# Altium PCB PCB.PcbDoc
Units mm, origin at the board's own origin, x right, y up, seen from the top; angles counter-clockwise.
Board outline 109.9 x 81.78 mm, 2 copper layers (Top Layer, Bottom Layer), stack 0.98 mm thick; 48 components, 25 nets, 128 pads, 18 vias.
Unrouted connection lines stored in the file: 4.
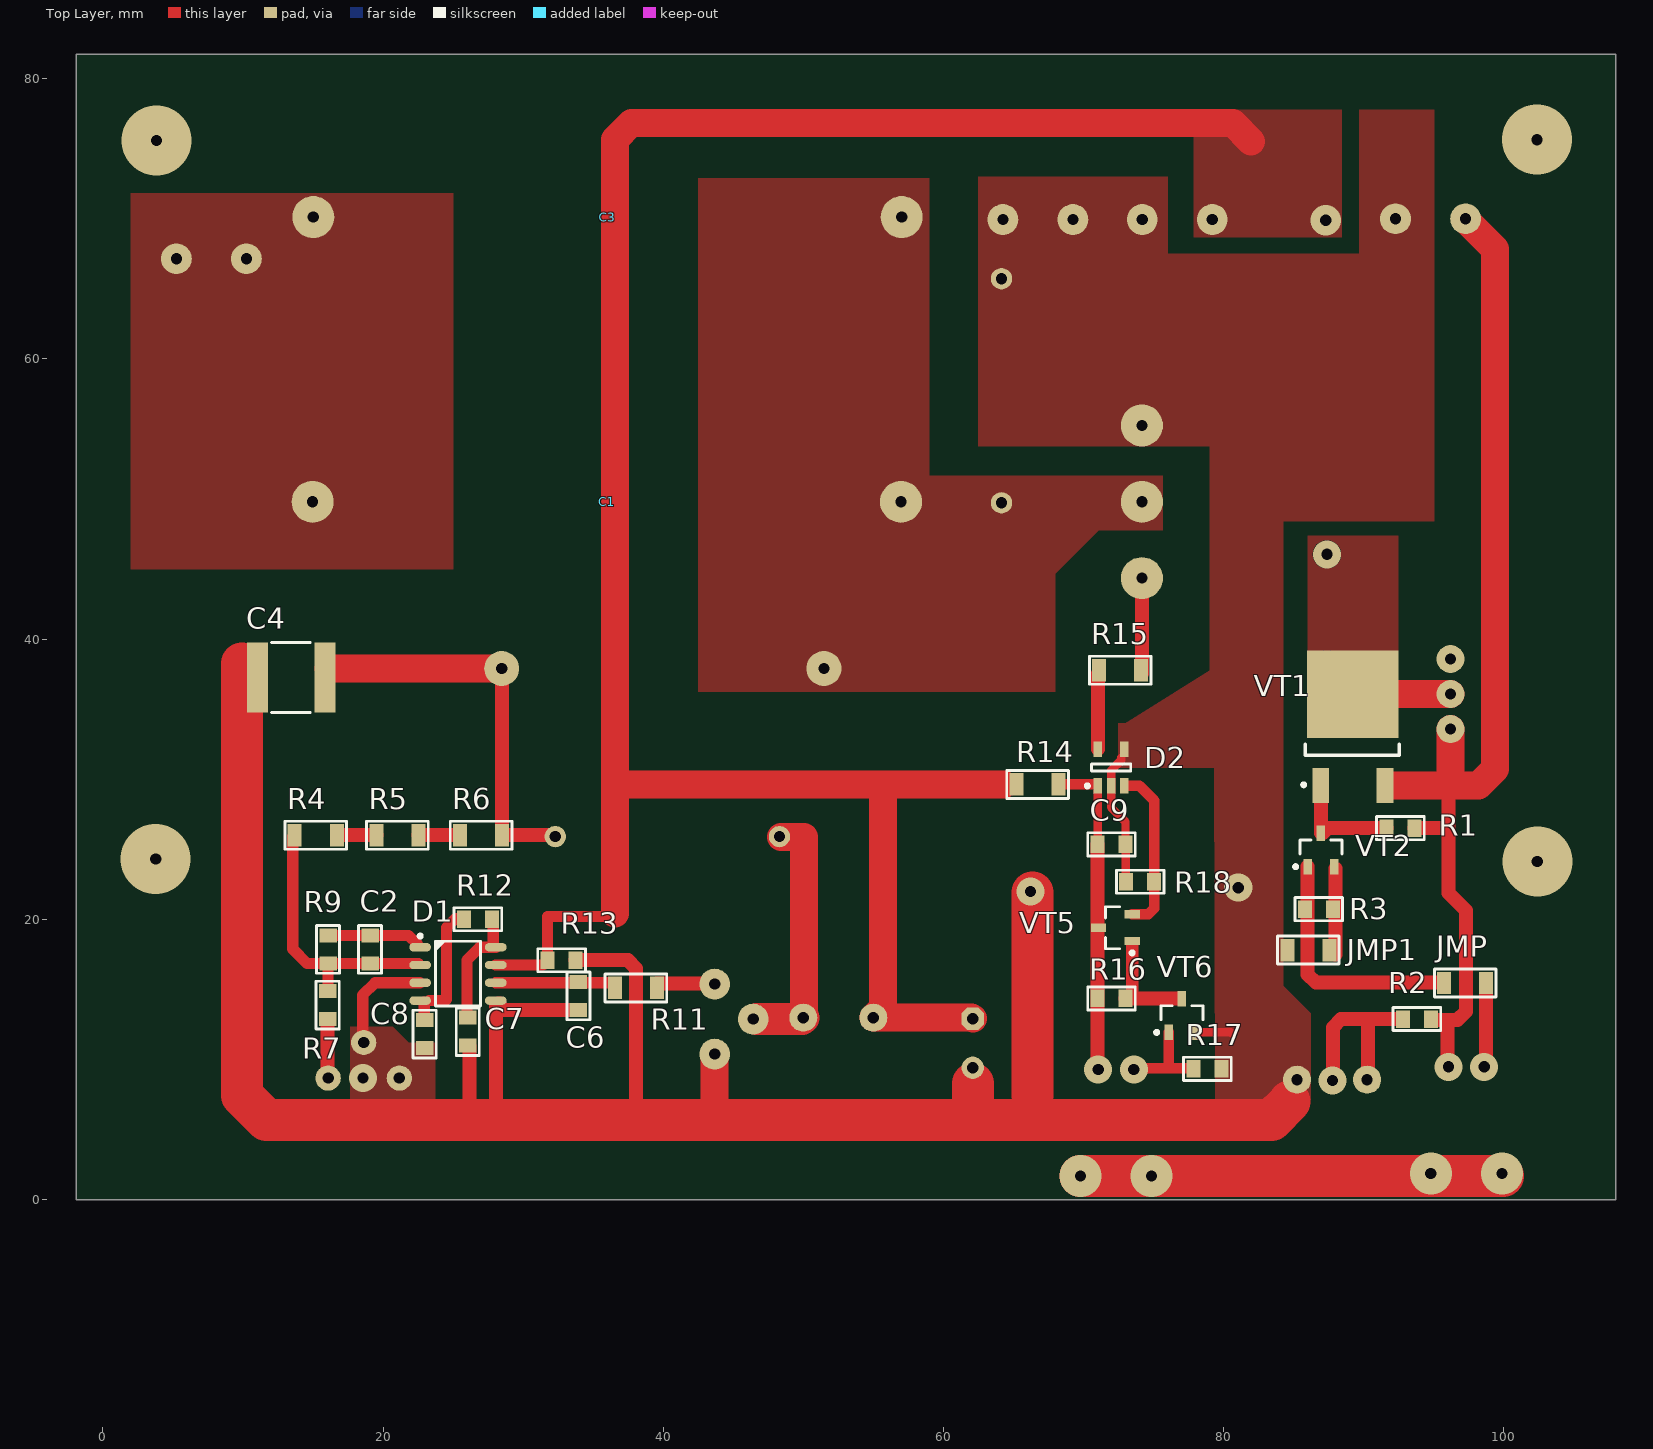
[diagram p0: Top Layer view]
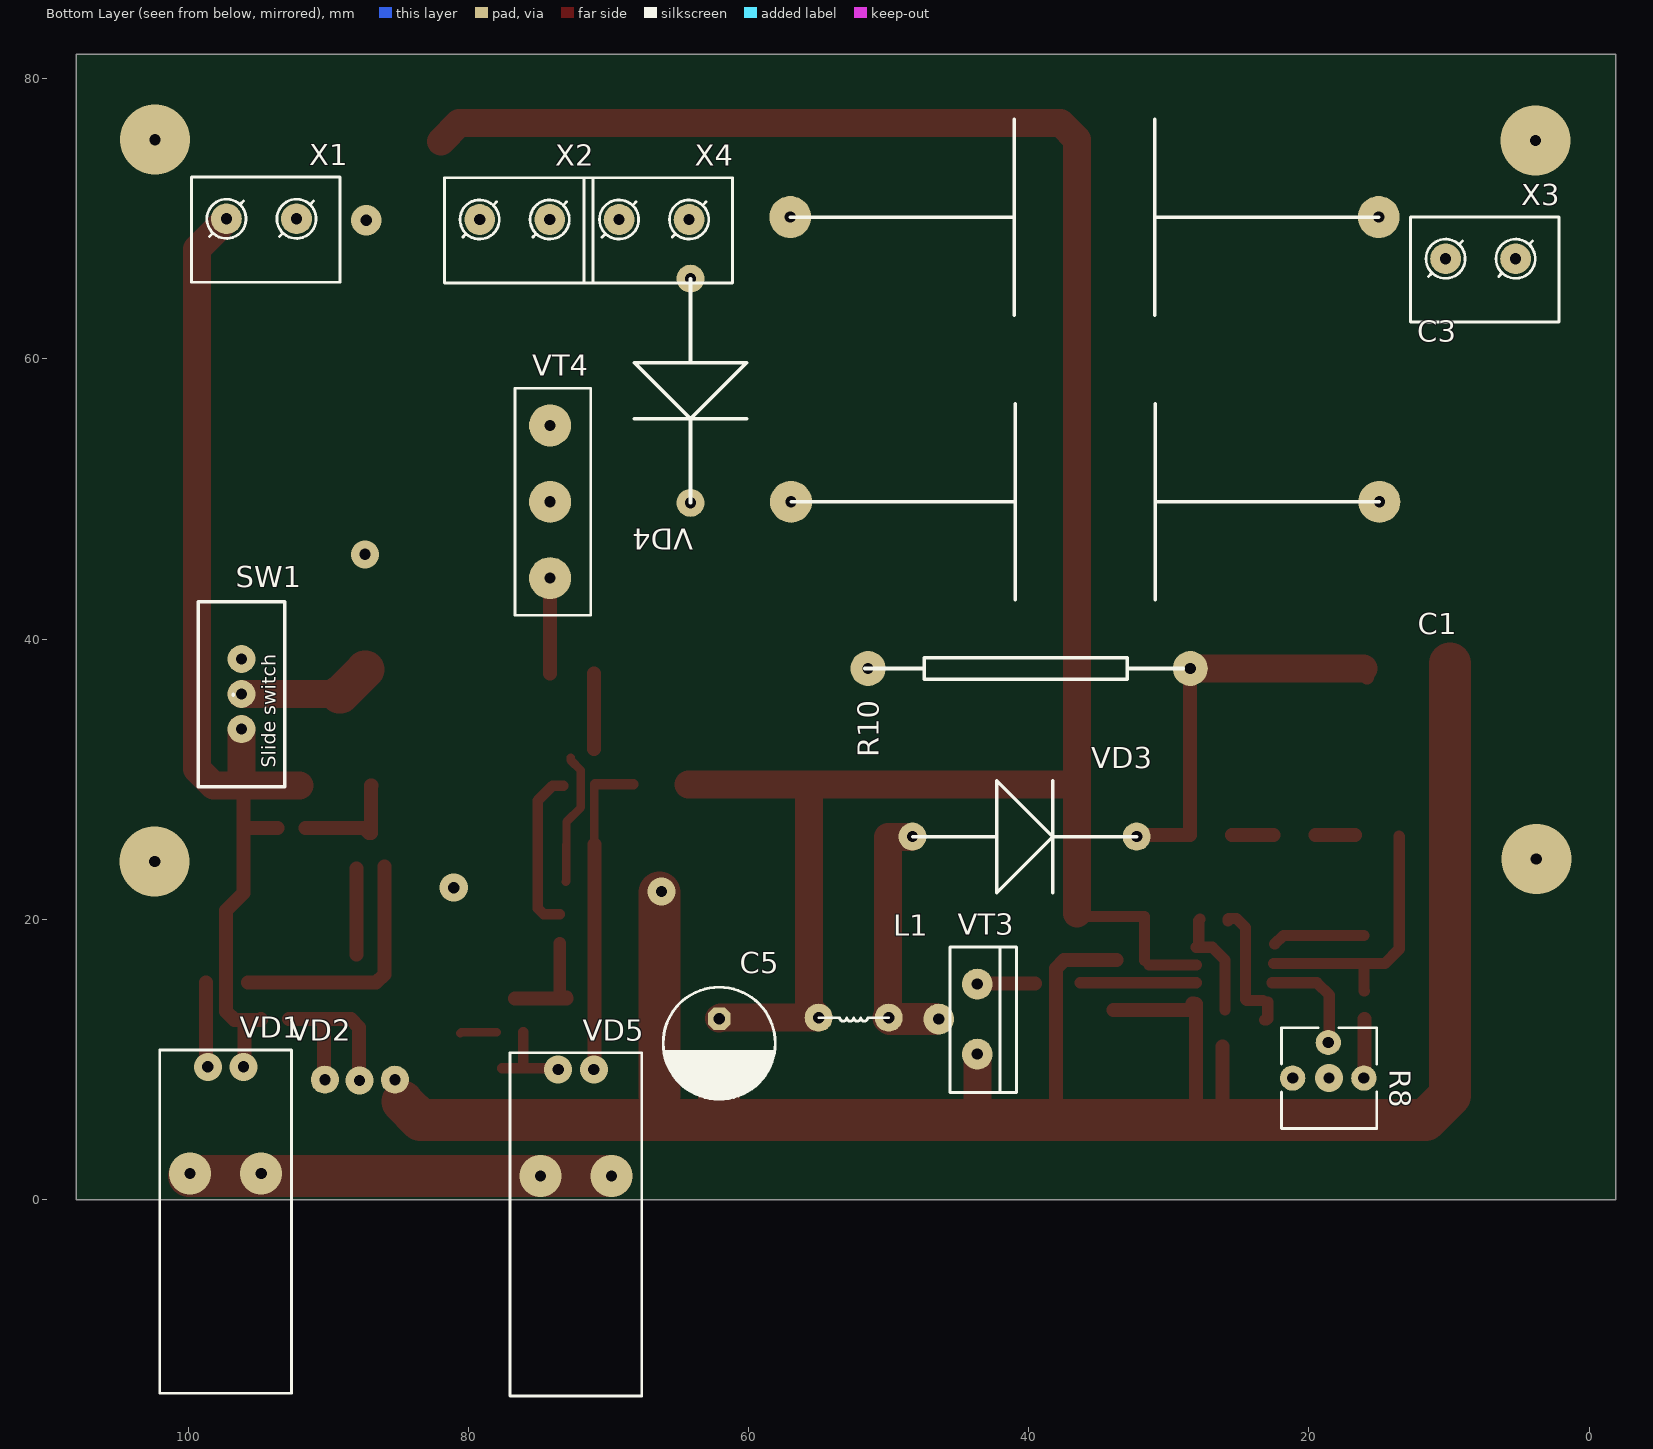
[diagram p1: Bottom Layer view, seen from below]
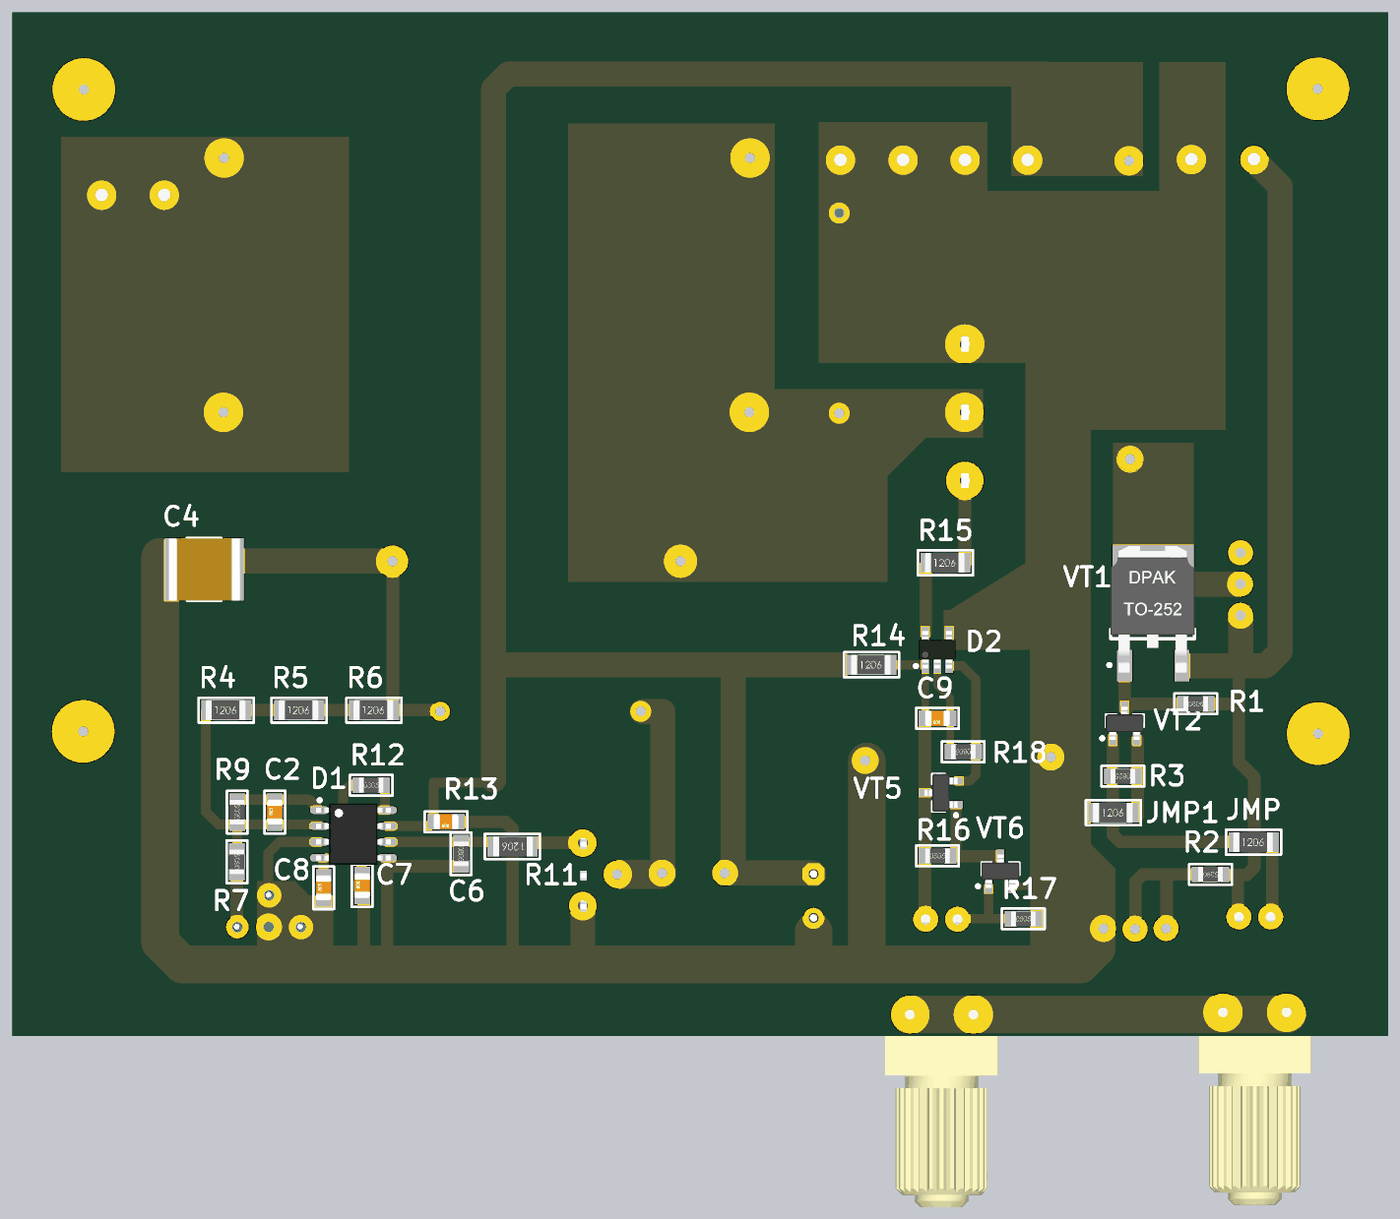
[diagram p2: 3D render of the assembled board from above, using the file's embedded part models]
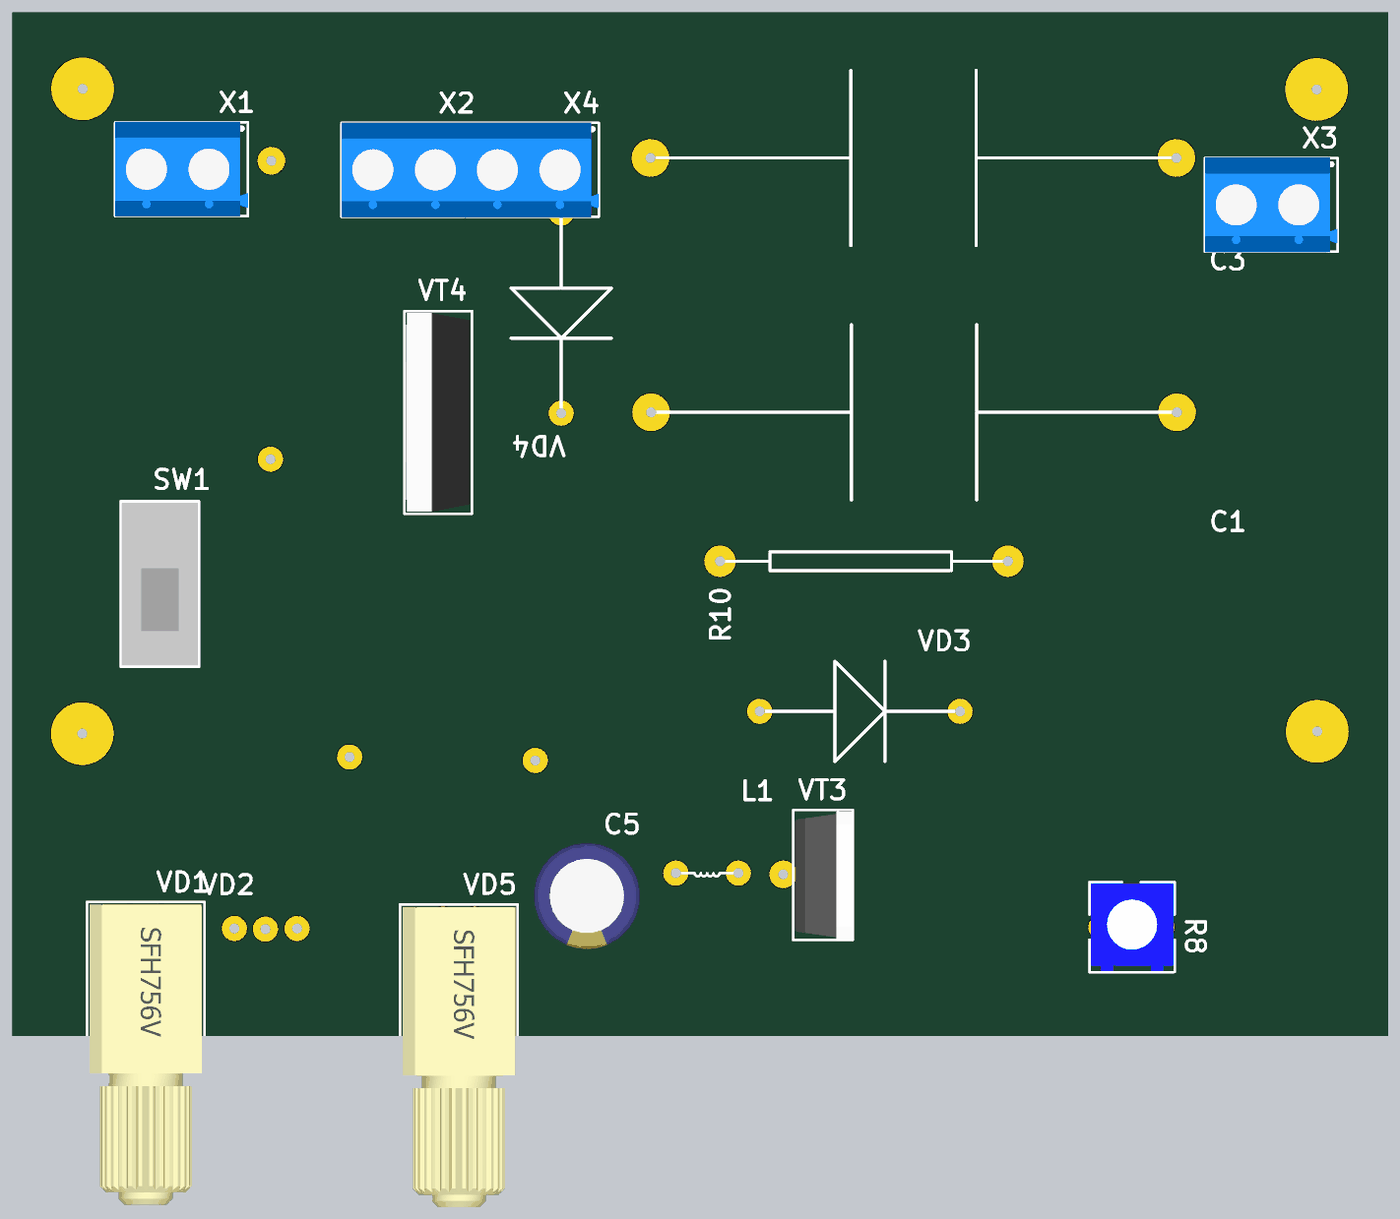
[diagram p3: 3D render of the assembled board from below, using the file's embedded part models]

## Layer stack, top to bottom
Top Solder: solder mask 0.0102, Solder Resist, Dk 3.5
Top Layer: signal copper 0.0356
Dielectric 1: dielectric 0.909, FR-4, Dk 4.8
Bottom Layer: signal copper 0.0356
Bottom Solder: solder mask 0.0102, Solder Resist, Dk 3.5

## Board outline
-1.9,-0.025 -1.9,81.75 108,81.75 108,-0.025

## Design rules (kind name [scope] priority, off if disabled: settings)
BoardOutlineClearance [All] p1: gap=0.3 ignorepadtopadclearanceinfootprint=FALSE
Clearance Clearance_MultiLayerPad [OnLayer('Multi-Layer') and IsPad] p1: gap=0.3 ignorepadtopadclearanceinfootprint=FALSE
Clearance Clearance_Polygon [InPolygon] p2: gap=0 ignorepadtopadclearanceinfootprint=FALSE
Clearance [All] p3: gap=0.1 ignorepadtopadclearanceinfootprint=FALSE
ComponentClearance [All] p1: gap=-3 collisioncheckmode=3 verticalgap=0.5 showdistances=FALSE
DiffPairsRouting [All] p1: maxlimit=0.4 minlimit=0.2 mostfreqgap=0.2 toplayer_minwidth=0.2 toplayer_maxwidth=0.3 toplayer_prefwidth=0.2 bottomlayer_minwidth=0.2 bottomlayer_maxwidth=0.3 bottomlayer_prefwidth=0.2 maxuncoupledlength=12.7
Height [All] p1: minheight=0 maxheight=50 prefheight=12.7
HoleSize [All] p1: absolutevalues=TRUE maxlimit=10 minlimit=0.2 maxpercent=80.000 minpercent=20.000
HoleToHoleClearance [All] p1: gap=0.3 allowstackedmicrovias=TRUE
MinimumSolderMaskSliver [All] p1: minsoldermaskwidth=0.2
PlaneClearance [All] p1: clearance=0
PlaneConnect [All] p1: planeconnectstyle=Direct reliefexpansion=0 reliefentries=4 reliefconductorwidth=0.7 reliefairgap=1
PolygonConnect PolygonConnect_PadGND [InNet('GND') and IsPad] p1: connectstyle=Direct reliefconductorwidth=1 reliefentries=4 polygonreliefangle="90 Angle" airgapwidth=0.5
PolygonConnect PolygonConnect_Via [IsVia] p2: connectstyle=Direct reliefconductorwidth=0.254 reliefentries=4 polygonreliefangle="90 Angle" airgapwidth=0.254
PolygonConnect [All] p3: connectstyle=Direct reliefconductorwidth=1 reliefentries=4 polygonreliefangle="90 Angle" airgapwidth=0.5
RoutingTopology [All] p1: topology=Vertical
RoutingVias [All] p1: holewidth=0.2 width=0.4 viastyle="Through Hole" minholewidth=0.2 minwidth=0.4 maxholewidth=0.5 maxwidth=1.2
SilkToSolderMaskClearance [IsPad] p1: minsilkscreentomaskgap=0.2 clearancetoexposedcopper=TRUE
SolderMaskExpansion [All] p1: expansion=0.075 istentingtop=FALSE
Width [All] p1: maxlimit=10 minlimit=0.2 preferedwidth=0.2
20 further rules are at their usual default settings.

## Components (designator, comment, footprint, x,y, rotation, side; value= is the part's Value field where it differs from the comment)
C1 "DHRB34C102M2FB 1000пФ х 15кВ" "CAP: HV_CYL_METALL-PAPER_CAP" 35.975,49.8 r0 top
C2 "Ceramic capacitor, 100pF, X7R, ±10%, 16V, 0805, -55...+125°C" "CAP: 0805" 19.075,17.85 r90 top value=100pF
C3 "DHRB34C102M2FB 1000пФ х 15кВ" "CAP: HV_CYL_METALL-PAPER_CAP" 36.025,70.125 r0 top
C4 "Ceramic capacitor, 0.1μF, X7R, ±10%, 50V, 2220, -55...+125°C" "CAP: 2220" 11.05,37.25 r90 top value=0.1μF
C5 "Aluminium capacitor, 470μF, 25V, ±20%, 54mOhm, 14x10x5 mm, -55...+105°C" "CAP: D8C3.5H12" 62.1,11.15 r270 bottom value=470μF
C6 "Ceramic capacitor, 1uF, X7R, ±10%, 16V, 0805, -55...+125°C" "CAP: 0805" 32.75,17.075 r180 top value=1uF
C7 "Ceramic capacitor, 1uF, X7R, ±10%, 16V, 0805, -55...+125°C" "CAP: 0805" 26.05,11.975 r90 top value=1uF
C8 "Ceramic capacitor, 2200pF, X7R, ±10%, 16V, 0805, -55...+125°C" "CAP: 0805" 22.975,11.8 r90 top value=2200pF
C9 "Ceramic capacitor, 4.7μF, X7R, ±10%, 16V, 0805, -55...+125°C" "CAP: 0805" 72,25.35 r180 top value=4.7μF
D1 "PWM controller, supply 10...30V, 500kHz, External switch, -40...+105°C, 8-SOIC" 8-SOIC 25.35,16.1 r0 top
D2 "FAN3100TSX" SOT23-5 71.975,30.825 r90 top
JMP "Resistor film, 4M3, ±5%, 1206, 0.25W, -55...+125°C" "RES: 1206" 97.25,15.45 r0 top value=4M3 (schematic designator R6)
JMP1 "Resistor film, 4M3, ±5%, 1206, 0.25W, -55...+125°C" "RES: 1206" 86.05,17.8 r0 top value=4M3 (schematic designator R6)
L1 "470uH" "IND: DUMBELL 8.5x11x5" 52.5,12.975 r0 bottom
R1 "Resistor film, 100k, ±5%, 0805, 0.125W, -55...+125°C" "RES: 0805" 92.625,26.5 r0 top value=100k
R2 "Resistor film, 100R, ±5%, 0805, 0.125W, -55...+125°C" "RES: 0805" 93.8,12.875 r0 top value=100R
R3 "Resistor film, 100k, ±5%, 0805, 0.125W, -55...+125°C" "RES: 0805" 86.8,20.725 r180 top value=100k
R4 "Resistor film, 4M3, ±5%, 1206, 0.25W, -55...+125°C" "RES: 1206" 15.199,26 r0 top value=4M3
R5 "Resistor film, 4M3, ±5%, 1206, 0.25W, -55...+125°C" "RES: 1206" 21.025,26 r0 top value=4M3
R6 "Resistor film, 4M3, ±5%, 1206, 0.25W, -55...+125°C" "RES: 1206" 27,26 r0 top value=4M3
R7 "Resistor film, 36k, ±5%, 0805, 0.125W, -55...+125°C" "RES: 0805" 16.05,13.875 r90 top value=36k
R8 "Resistor film, 10k, ±10%, 3296W, 0.5W, -55...+125°C" "RES: 3362P" 21.165,8.66 r180 bottom value=10k
R9 "Resistor film, 2.2M, ±5%, 0805, 0.125W, -55...+125°C" "RES: 0805" 16.075,17.85 r90 top value=2.2M
R10 "ТВО" "RES: ТВО 0.5" 39.975,37.9 r0 bottom
R11 "Resistor film, 100R, ±5%, 1206, 0.25W, -55...+125°C" "RES: 1206" 38.05,15.1 r180 top value=100R
R12 "Resistor film, 20k, ±5%, 0805, 0.125W, -55...+125°C" "RES: 0805" 26.775,20 r0 top value=20k
R13 "Resistor film, 470R, ±5%, 0805, 0.125W, -55...+125°C" "RES: 0805" 33.95,14.525 r270 top value=470R
R14 "Resistor film, 10R, ±5%, 1206, 0.25W, -55...+125°C" "RES: 1206" 66.725,29.625 r0 top value=10R
R15 "Resistor film, 3R3, ±5%, 1206, 0.25W, -55...+125°C" "RES: 1206" 72.625,37.775 r0 top value=3R3
R16 "Resistor film, 4k7, ±5%, 0805, 0.125W, -55...+125°C" "RES: 0805" 72,14.35 r0 top value=4k7
R17 "Resistor film, 20k, ±5%, 0805, 0.125W, -55...+125°C" "RES: 0805" 78.85,9.325 r0 top value=20k
R18 "Resistor film, 2k, ±5%, 0805, 0.125W, -55...+125°C" "RES: 0805" 74.05,22.675 r180 top value=2k
SW1 "Slide switch" "SW: Slide_switch 3mm between outputs" 96.2,36.075 r90 bottom
VD1 "SHF250" "LED: SFH757" 97.335,5.66 r180 bottom
VD2 "LED, Green, *, *, *, -55...+150°C" "through component 5 mm" 87.75,8.55 r180 bottom
VD3 "HER108" "DIODE: DO-41" 40.3,25.9 r180 bottom
VD4 "HER108" "DIODE: DO-41" 64.15,57.725 r270 bottom
VD5 "SHF250" "LED: SFH757" 72.325,5.475 r180 bottom
VT1 "MOSFET P-channel transistor, 20V, 2.6A, 2.9nC, 2.5W, 135mOhm, 220pF, SOT-23, -55...+150°C" DPAK 89.225,32.8 r90 top
VT2 "NPN transistor, 45V, 100mA, 100MHz, 300mW, 0.6V, 420, SOT-23, -55...+125°C" SOT23 86.95,24.95 r90 top
VT3 "MOSFET N-channel transistor, 80V, 7A, 9.1nC, 2.5W, 34mOhm, 756pF, 8-TDSON, -55...+150°C" "TO-220 HV" 43.675,12.875 r270 bottom
VT4 "IGBT transistor, 650V, 40A, 40nC, 144W, 2.1V, 22ns/73ns, TO247, -55...+125°C" TO247 74.175,49.8 r90 bottom
VT5 "MOSFET P-channel transistor, 20V, 2.6A, 2.9nC, 2.5W, 135mOhm, 220pF, SOT-23, -55...+150°C" SOT23 72.275,19.4 r180 top
VT6 "NPN transistor, 45V, 100mA, 100MHz, 300mW, 0.6V, 420, SOT-23, -55...+125°C" SOT23 77.025,13.125 r90 top
X1 "Terminal connector, 2pin, 3.5mm, 300VAC, 10A" "CON: KF301-5.0-2P" 94.55,69.175 r0 bottom
X2 "Terminal connector, 2pin, 3.5mm, 300VAC, 10A" "CON: KF301-5.0-2P" 76.475,69.125 r0 bottom
X3 "Terminal connector, 2pin, 3.5mm, 300VAC, 10A" "CON: KF301-5.0-2P" 7.525,66.325 r0 bottom
X4 "Terminal connector, 2pin, 3.5mm, 300VAC, 10A" "CON: KF301-5.0-2P" 66.525,69.125 r0 bottom

## Footprints (in the part's own frame and the unit in brackets; to place one, negate y for a bottom-side part, rotate by r counter-clockwise, add the part's x,y. Pads: shape width x height; smd on the part's side, far side on the other; paste and mask are expansions set on the pad)
8-SOIC [mm] "pitch 1.27 mm"
  rrect100% 1.55x0.6 smd: 1(-2.7,1.905) 2(-2.7,0.635) 3(-2.7,-0.635) 4(-2.7,-1.905) 5(2.7,-1.905) 6(2.7,-0.635) 7(2.7,0.635) 8(2.7,1.905)
  round 0.7 on Mech1: 28(-2.395,1.8)
  silkscreen extent -2.82,-2.3 1.61,2.82, body extent -3,-2.45 3,2.45, height 1.75
"CAP: 0805" [mm]
  rect 1x1.25 smd: 1(-1,0) 2(1,0)
  silkscreen extent -1.7,-0.82 1.7,0.82, body extent -1,-0.62 1,0.63, height 0.78
"CAP: 2220" [mm]
  rect 5x1.5 smd: 1(0,0) 2(0,-4.8)
  silkscreen extent -2.5,-3.75 2.5,-1, body extent -2.5,-5.25 2.5,0.45, height 2.3
"CAP: D8C3.5H12" [mm]
  oct 1.6x1.6 hole 0.8: 1(-1.75,0)
  round 1.6 hole 0.8: 2(1.75,0)
  silkscreen extent -4,-4 4,4, body extent -4.25,-4.25 4.25,4.25, height 13
"CAP: HV_CYL_METALL-PAPER_CAP" [mm]
  round 3 hole 0.8: 1(-21,0) 2(21,0)
"CON: KF301-5.0-2P" [mm]
  round 2.2 hole 0.8: 1(2.725,-0.825) 2(-2.275,-0.825)
  round 0.5 on Bottom Overlay: ""(-4.875,-3.3)
  silkscreen extent -5.38,-3.8 5.23,3.7, body extent -5.37,-3.85 5.23,3.75, height 10
"DIODE: DO-41" [mm]
  round 2 / inner round 1.524 / far side round 1.524 hole 0.8: 1(-8,0) 2(8,0)
  silkscreen extent -8,-4 8,4
DPAK [mm]
  rect 2.5x1.2 smd: 1(-3.25,2.29) 3(-3.25,-2.29)
  rect 6.25x6.5 smd: 2(3.25,0)
  round 0.5 on Mech1: ""(-3.2,2.9)
  silkscreen extent -3.32,-3.3 -0.3,3.62, body extent -3.8,-3.32 6.3,3.42, height 2.37
"IND: DUMBELL 8.5x11x5" [mm]
  round 2 hole 0.8: 1(-2.5,0) 2(2.5,0)
  silkscreen extent -2.5,0 2.5,0.25
"LED: SFH757" [mil]
  round 60 hole 31.5: 1(-50,150) 2(50,150) 3(-100,-150) 4(100,-150)
  silkscreen extent -185,-768 185,197, body extent -177,-756 177,189, height 390
"RES: 0805" [mm]
  rect 1x1.25 smd: 1(-1,0) 2(1,0)
  silkscreen extent -1.7,-0.82 1.7,0.82, body extent -1,-0.6 1,0.6, height 0.44
"RES: 1206" [mm]
  rect 1x1.6 smd: 1(-1.5,0) 2(1.5,0)
  silkscreen extent -2.2,-1 2.2,1, body extent -1.65,-0.8 1.55,0.8, height 0.47
"RES: 3362P" [mm]
  round 1.8 hole 0.8: 1(0,0) 2(2.54,2.54) 3(5.08,0)
  silkscreen extent -0.8,-3.6 6,3.6, body extent -0.7,-3.49 5.9,3.5, height 4.5
"RES: ТВО 0.5" [mm]
  round 2.5 hole 0.8: 1(-11.5,0) 2(11.5,0)
  silkscreen extent -11,-0.75 11.75,0.75
SOT23 [mm]
  rect 1.1x0.6 smd: 1(-1.2,0.95) 2(-1.2,-0.95) 3(1.2,0)
  round 0.5 on Mech1: ""(-0.9,1.1)
  silkscreen extent -1.32,-1.5 0.7,1.92, body extent -1.32,-1.52 1.32,1.52, height 1.12
SOT23-5 [mm] "pitch 0.95 mm"
  rect 1.1x0.6 smd: 1(-1.3,0.95) 2(-1.3,0) 3(-1.3,-0.95) 4(1.3,-0.95) 5(1.3,0.95)
  round 0.5 on Mech1: ""(-1.1,1.1)
  silkscreen extent -1.42,-1.4 0.25,1.82, body extent -1.5,-1.5 1.5,1.5, height 1.3
"SW: Slide_switch 3mm between outputs" [mm]
  round 2 hole 0.8: 1(0,0) 2(-2.5,0) 3(2.5,0)
  silkscreen extent -6.6,-3.1 6.6,3.1, body extent -6.5,-3.05 6.5,3.05, height 10
"through component 5 mm" [mm]
  round 2 hole 0.8: 1(-2.5,0) 2(2.5,0)
TO247 [mm] "3-Lead Plastic TO-247"
  round 3 hole 0.8: 1(-5.45,0) 2(0,0) 3(5.45,0)
  round 0.5 on Mech2: ""(-7.4,-2.3)
  silkscreen extent -8.1,-2.9 8.1,2.5, body extent -7.95,-2.75 7.95,2.35, height 26.95
"TO-220 HV" [mm]
  round 2.2 hole 0.8: 1(-2.5,0) 2(0,-2.75) 3(2.5,0)
  silkscreen extent -5.15,-1.95 5.25,2.8, body extent -5,-1.8 5.2,2.7, height 22.06

## Part data
C1 C3: library part THROUGH_HOLE_CAP
C2 C6 C7 C8 C9: library part Ceramic_0805, Manufacturer=Yageo, Package=0805, PartNumber=CC0805KRX7R7BB104, Temperature=-55...+125°C, Tolerance=±10%, TypeCapacitor="Ceramic capacitor", TypeDielectric=X7R, Voltage=16V, HelpURL=https://www.digikey.com/product-detail/en/yageo/CC0805KRX7R7BB104/311-1142-1-ND/303052
  C2: ValueManufacturerPartNumber="Ceramic capacitor, 100pF, X7R, ±10%, 16V, 0805, -55...+125°C"
  C6 C7: ValueManufacturerPartNumber="Ceramic capacitor, 1uF, X7R, ±10%, 16V, 0805, -55...+125°C"
  C8: ValueManufacturerPartNumber="Ceramic capacitor, 2200pF, X7R, ±10%, 16V, 0805, -55...+125°C"
  C9: ValueManufacturerPartNumber="Ceramic capacitor, 4.7μF, X7R, ±10%, 16V, 0805, -55...+125°C"
C4: library part Ceramic_2220, Manufacturer=Yageo, Package=2220, PartNumber=CC2220KKX7R9BB105, Temperature=-55...+125°C, Tolerance=±10%, TypeCapacitor="Ceramic capacitor", TypeDielectric=X7R, Voltage=50V, HelpURL=https://www.digikey.com/product-detail/en/yageo/CC2220KKX7R9BB105/311-2069-1-ND/5195971, ValueManufacturerPartNumber="Ceramic capacitor, 0.1μF, X7R, ±10%, 50V, 2220, -55...+125°C"
C5: library part Aluminium, Manufacturer=Wurth, Package="14x10x5 mm", PartNumber=860080475013, Temperature=-55...+105°C, Tolerance=±20%, TypeCapacitor="Aluminium capacitor", Voltage=25V, HelpURL=https://www.digikey.com/product-detail/en/wurth-electronics-inc/860080475013/732-9029-1-ND/5728972, Impedance=54mOhm, ValueManufacturerPartNumber="Aluminium capacitor, 470μF, 25V, ±20%, 54mOhm, 14x10x5 mm, -55...+105°C"
D1: library part UC3842BVD1R2G, "PWM controller", Frequency=500kHz, Manufacturer="ON Semiconductor", Package=8-SOIC, PartNumber=KA3845, Temperature=-40...+105°C, VoltageInput="supply 10...30V", ComponentType="PWM controller", HelpURL=https://www.digikey.com/product-detail/en/on-semiconductor/UC3842BVD1R2G/UC3842BVD1R2GOSCT-ND/5802572, OutputType="External switch", ValueManufacturerPartNumber="PWM controller, supply 10...30V, 500kHz, External switch, -40...+105°C, 8-SOIC"
D2: "Gate driver"
JMP JMP1 R4 R5 R6 R11 R14 R15: library part Resistor_1206, Manufacturer=Yageo, Package=1206, PartNumber=RC1206JR-07100RL, Power=0.25W, Temperature=-55...+125°C, Tolerance=±5%, TypeResistor="Resistor film", HelpURL=https://www.digikey.com/product-detail/en/yageo/RC1206JR-07100RL/311-100ERCT-ND/732153
  JMP JMP1 R4 R5 R6: ValueManufacturerPartNumber="Resistor film, 4M3, ±5%, 1206, 0.25W, -55...+125°C"
  R11: ValueManufacturerPartNumber="Resistor film, 100R, ±5%, 1206, 0.25W, -55...+125°C"
  R14: ValueManufacturerPartNumber="Resistor film, 10R, ±5%, 1206, 0.25W, -55...+125°C"
  R15: ValueManufacturerPartNumber="Resistor film, 3R3, ±5%, 1206, 0.25W, -55...+125°C"
L1: library part Inductor_dumbbell
R1 R2 R3 R7 R9 R12 R13 R16 R17 R18: library part Resistor_0805, Manufacturer=Yageo, Package=0805, PartNumber=RC0805JR-07100RL, Power=0.125W, Temperature=-55...+125°C, Tolerance=±5%, TypeResistor="Resistor film", HelpURL=https://www.digikey.com/product-detail/en/yageo/RC0805JR-07100RL/311-100ARCT-ND/731185
  R1 R3: ValueManufacturerPartNumber="Resistor film, 100k, ±5%, 0805, 0.125W, -55...+125°C"
  R2: ValueManufacturerPartNumber="Resistor film, 100R, ±5%, 0805, 0.125W, -55...+125°C"
  R7: ValueManufacturerPartNumber="Resistor film, 36k, ±5%, 0805, 0.125W, -55...+125°C"
  R9: ValueManufacturerPartNumber="Resistor film, 2.2M, ±5%, 0805, 0.125W, -55...+125°C"
  R12 R17: ValueManufacturerPartNumber="Resistor film, 20k, ±5%, 0805, 0.125W, -55...+125°C"
  R13: ValueManufacturerPartNumber="Resistor film, 470R, ±5%, 0805, 0.125W, -55...+125°C"
  R16: ValueManufacturerPartNumber="Resistor film, 4k7, ±5%, 0805, 0.125W, -55...+125°C"
  R18: ValueManufacturerPartNumber="Resistor film, 2k, ±5%, 0805, 0.125W, -55...+125°C"
R8: library part Trimmer, Manufacturer=Bourns, Package=3296W, PartNumber=3296W-1-103LF, Power=0.5W, Temperature=-55...+125°C, Tolerance=±10%, TypeResistor="Resistor film", HelpURL=https://www.digikey.com/product-detail/en/bourns-inc/3296W-1-103LF/3296W-103LF-ND/1088045, ValueManufacturerPartNumber="Resistor film, 10k, ±10%, 3296W, 0.5W, -55...+125°C"
R10: library part "HV RESISTOR"
SW1: library part Slide_switch
VD2: library part LED_single, Color=GREEN, ColorParameter=Green, Temperature=-55...+150°C, TypeDiode=LED, ValueManufacturerPartNumber="LED, Green, *, *, *, -55...+150°C"
VD3 VD4: library part Through_hole_single_diode
VT1: library part MOSFET_P_132, CurrentDS=2.6A, InputCapacitor=220pF, Manufacturer="Infineon Technologies", MaxPower=2.5W, Package=SOT-23, PartNumber=IRFU5305, Temperature=-55...+150°C, VoltageDS=20V, GateCharge=2.9nC, HelpURL=https://www.digikey.com/product-detail/en/infineon-technologies/IRLML2246TRPBF/IRLML2246TRPBFCT-ND/2639576, RDS=135mOhm, TypeTransistor="MOSFET P-channel transistor", ValueManufacturerPartNumber="MOSFET P-channel transistor, 20V, 2.6A, 2.9nC, 2.5W, 135mOhm, 220pF, SOT-23, -55...+150°C"
VT2: library part BJT_NPN_132, CurrentCE=100mA, CurrentGain=420, Frequency=100MHz, Manufacturer="ON Semiconductor", MaxPower=300mW, Package=SOT-23, PartNumber=BC817, Temperature=-55...+125°C, VoltageCE=45V, VoltageSaturation=0.6V, HelpURL=https://www.digikey.com/product-detail/en/on-semiconductor/BC847CLT1G/BC847CLT1GOSCT-ND/917836, TypeTransistor="NPN transistor", ValueManufacturerPartNumber="NPN transistor, 45V, 100mA, 100MHz, 300mW, 0.6V, 420, SOT-23, -55...+125°C"
VT3: library part MOSFET_N_123, CurrentDS=7A, InputCapacitor=756pF, Manufacturer="Infineon Technologies", MaxPower=2.5W, Package=8-TDSON, PartNumber=STF6NK90Z, Temperature=-55...+150°C, VoltageDS=80V, GateCharge=9.1nC, HelpURL=https://www.digikey.com/product-detail/en/infineon-technologies/BSC340N08NS3GATMA1/BSC340N08NS3GATMA1TR-ND/2080655, RDS=34mOhm, TypeTransistor="MOSFET N-channel transistor", ValueManufacturerPartNumber="MOSFET N-channel transistor, 80V, 7A, 9.1nC, 2.5W, 34mOhm, 756pF, 8-TDSON, -55...+150°C"
VT4: library part IGBT, CurrentCE=40A, Manufacturer="Rohm Semiconductor", MaxPower=144W, Package=TO247, PartNumber=IRG4PH50U, Temperature=-55...+125°C, VoltageCE=650V, VoltageSaturation=2.1V, GateCharge=40nC, HelpURL=https://www.digikey.com/product-detail/en/rohm-semiconductor/RGTH40TS65GC11/RGTH40TS65GC11-ND/5029953, TimeOnOff=22ns/73ns, TypeTransistor="IGBT transistor", ValueManufacturerPartNumber="IGBT transistor, 650V, 40A, 40nC, 144W, 2.1V, 22ns/73ns, TO247, -55...+125°C"
VT5: library part MOSFET_P_132, CurrentDS=2.6A, InputCapacitor=220pF, Manufacturer="Infineon Technologies", MaxPower=2.5W, Package=SOT-23, PartNumber=BSS84, Temperature=-55...+150°C, VoltageDS=20V, GateCharge=2.9nC, HelpURL=https://www.digikey.com/product-detail/en/infineon-technologies/IRLML2246TRPBF/IRLML2246TRPBFCT-ND/2639576, RDS=135mOhm, TypeTransistor="MOSFET P-channel transistor", ValueManufacturerPartNumber="MOSFET P-channel transistor, 20V, 2.6A, 2.9nC, 2.5W, 135mOhm, 220pF, SOT-23, -55...+150°C"
VT6: library part BJT_NPN_132, CurrentCE=100mA, CurrentGain=420, Frequency=100MHz, Manufacturer="ON Semiconductor", MaxPower=300mW, Package=SOT-23, PartNumber=PMBT2379, Temperature=-55...+125°C, VoltageCE=45V, VoltageSaturation=0.6V, HelpURL=https://www.digikey.com/product-detail/en/on-semiconductor/BC847CLT1G/BC847CLT1GOSCT-ND/917836, TypeTransistor="NPN transistor", ValueManufacturerPartNumber="NPN transistor, 45V, 100mA, 100MHz, 300mW, 0.6V, 420, SOT-23, -55...+125°C"
X1 X2 X3 X4: library part Connector_terminal_2pin, CurrentMax=10A, Manufacturer=Degson, PartNumber=DG350-3.5-02P-14, VoltageMax=300VAC, CommentText="\"Разъем\"", HelpURL=https://www.chipdip.ru/product/dg350-3.5-02p-12, Multichannel=2pin, Pitch=3.5mm, TypeConnector="Terminal connector", ValueManufacturerPartNumber="Terminal connector, 2pin, 3.5mm, 300VAC, 10A"

## Via types
v1: diameter 2, hole 0.8, Top Layer to Bottom Layer, 9 vias
v2: diameter 3, hole 0.8, Top Layer to Bottom Layer, 4 vias
v3: diameter 5, hole 0.8, Top Layer to Bottom Layer, 4 vias
v4: diameter 2.2, hole 0.8, Top Layer to Bottom Layer, 1 vias

## Nets (pads, with @x,y where several pads share a name; then routed paths per layer and width w, separated by ;. In a path a pad name is that pad's centre, name@x,y a point inside that pad or via, vN(x,y) a via of type N, cw(c..) or ccw(c..) an arc to the next point about the centre after c; other vN are vias at no path point)
Gate_IGBT: R15.2 VT4.1 | length 6.8
  Top Layer w1: VT4.1@74.075,44.25 VT4.1 ; R15.2@74.175,37.55 VT4.1@74.175,44.25
GND: C4.1 C5.2 C6.1 C7.1 C8.1 C9.1 D1.3 D1.5 D2.2 D2.4 JMP1.1 JMP1.2 R3.1 R8.1 R8.2 R13.2 R17.2 R18.2 VD2.2 VD4.1 VT2.2 VT3.3 VT4.3 VT6.2 X1.2 X2.2 X4.1 X4.2 | length 189
  Top Layer w0.6: 72.7,31.55 72.7,31.35 71.975,30.625 D2.2 71.975,27.988 73,26.962 C9.1 73.025,25.325 73.025,22.7 R18.2 ; VT6.2 80.525,11.925 80.6,11.85
  Top Layer w0.8: R8.2 18.55,11.275 18.55,14.579 19.436,15.465 D1.3
  Top Layer w1: 26.175,5.775 C7.1@26.175,10.925 ; 28.05,5.75 D1.5@28.05,13.95 ; 28.225,13.525 R13.2 ; D1.5@28.25,13.995 D1.5@28.325,13.995 ; C6.1 37.489,17.075 38.075,16.489 38.075,5.85 ; JMP1.2@87.975,17.5 R3.1@87.975,20.85 ; R3.1@87.975,20.8 VT2.2@87.975,23.625
  Top Layer w2: 43.675,5.675 VT3.3@43.675,10.075
  Top Layer w3: 9.925,38.25 9.925,37.25 9.925,7.432 11.682,5.675 83.425,5.675 84.725,6.975 ; 62.1,5.675 62.1,8.27 ; 66.35,7.432 v1@66.35,21.9
  other v1: 18.575,8.675 66.225,21.975 81.05,22.25
NetC1_1: C1.1 C3.1 X3.1 X3.2
NetC1_2: C1.2 C3.2 R10.2 VD4.2 VT4.2
NetC2_1: C2.1 D1.2 R4.1 R7.2 R9.1 | length 19.5
  Top Layer w0.8: R4.1@13.575,25.925 13.557,25.907 13.557,17.879 14.586,16.85 R9.1 ; R7.2 16.075,14.875 R9.1 ; D1.2@22.535,16.85 C2.1 R9.1
NetC2_2: C2.2 D1.1 R9.2 | length 6.6
  Top Layer w0.8: R9.2 C2.2 21.825,18.85 D1.1@22.45,18.225
NetC4_2: C4.2 R6.2 R10.1 VD3.2 | length 28.8
  Top Layer w1: C4.2 15.85,37.65 C4.2@16.1,37.9 ; R10.1 28.5,37.875 R6.2 VD3.2@32.3,26
  Top Layer w2: C4.2@16.1,37.9 R10.1
NetC7_2: C7.2 D1.8 R12.2 | length 7.7
  Top Layer w0.8: 26,13.525 26,17.1 26.909,18.009 28.046,18.009 D1.8 ; R12.2 27.875,19.9 27.875,18.35
NetC8_2: C8.2 D1.4 R12.1 | length 9.6
  Top Layer w0.8: D1.4@22.95,14.095 22.95,12.9 23.05,12.8 C8.2@23.175,12.8 ; D1.4@23.3,14.195 24.445,14.195 24.525,14.275 24.525,19.4 25.175,20.05 R12.1@25.675,20.05 ; R12.1@25.775,19.875 25.775,19.95 R12.1@25.675,20.05 ; R12.1 25.725,20.05 R12.1@25.675,20.05
NetC9_2: C9.2 D2.1 R14.2 R16.1 VD5.2 VT5.3 | length 23
  Top Layer w0.6: C9.2@71.013,25.362 D2.1@71.013,29.513
  Top Layer w0.75: R14.2 D2.1@70.95,29.625
  Top Layer w0.8: C9.2 C9.2@71.013,25.362
  Top Layer w1: C9.2 R16.1 71,9.34 v1(71.055,9.285)
NetD1_6: D1.6 R11.2 R13.1 | length 8.3
  Top Layer w0.8: D1.6 R11.2@36.325,15.465
NetD2_3: D2.3 R18.1 VT5.2 | length 11.7
  Top Layer w0.75: 73.225,29.525 74,29.525 75.05,28.475 75.05,20.789 74.611,20.35 VT5.2
NetD2_5: D2.5 R15.1 | length 5.4
  Top Layer w1: D2.5@71.05,32.15 R15.1@71.05,37.55
NetL1_1: L1.1 VD3.1 VT3.2 | length 17.9
  Top Layer w2: VD3.1@48.425,25.875 50.05,25.875 50.05,13.025 L1.1
  Top Layer w2.3: VT3.2@46.675,12.875 49.9,12.875 L1.1
NetR1_1: R1.1 VT1.1 VT2.3 | length 8.2
  Top Layer w1: VT1.1@86.921,29.564 VT1.1 86.943,29.542 86.943,26.158 87.108,26.158 87.45,26.5 R1.1
NetR1_2: R1.2 R2.2 SW1.2 VD1.2 VT1.3 X1.1 | length 77.2
  Top Layer w1: R1.2 95.9,26.5 96.05,26.35 ; R2.2 94.8,12.825 95.975,12.825 ; 96.05,29.3 96.05,26.35 ; VD1.2@96.19,9.47 96.09,9.57 96.09,9.941 95.975,10.056 95.975,12.825 ; 95.975,12.825 96.714,12.825 97.3,13.411 97.3,20.612 96.05,21.862 96.05,26.35
  Top Layer w2: VT1.3@92.05,29.55 96.05,29.55 96.2,29.7 SW1.2 ; 96.075,29.55 98.203,29.55 99.375,30.722 99.375,67.846 97.275,69.946 X1.1
  other v1: 96.065,9.47
NetR2_1: R2.1 VD2.1 | length 13.4
  Top Layer w1: v1(87.775,8.5) 87.8,8.525 87.8,12.283 88.386,12.869 90.3,12.869 ; VD2.1 90.3,8.6 90.3,12.869 ; R2.1 92.8,12.869 90.3,12.869
NetR3_2: JMP.1 JMP.2 R3.2 VD1.1 VT2.1 | length 23.7
  Top Layer w1: VT2.1 86,16.061 86.586,15.475 JMP.1@95.725,15.475 ; JMP.2@98.725,15.475 98.725,9.475 VD1.1@98.73,9.47
  other v1: 98.605,9.47
NetR4_2: R4.2 R5.1 | length 2.8
  Top Layer w1: R4.2@16.699,26 R5.1
NetR5_2: R5.2 R6.1 | length 3
  Top Layer w1: R5.2 R6.1
NetR7_1: R7.1 R8.3 | length 4.5
  Top Layer w1: R8.3@16.01,8.44 16.03,8.46 16.03,12.875 R7.1
NetR11_1: R11.1 VT3.1 | length 4.1
  Top Layer w1: R11.1@39.55,15.425 39.575,15.4 43.65,15.4 VT3.1
NetR16_2: R16.2 VT5.1 VT6.3 | length 7.5
  Top Layer w0.75: R16.2 R16.2@73.013,14.337
  Top Layer w0.9: R16.2 R16.2@73,14.475 ; R16.2@73.475,14.65 VT5.1@73.475,18.3
  Top Layer w1: R16.2@73.013,14.337 73.475,14.337 76.688,14.337
NetR17_1: R17.1 VD5.1 VT6.1 | length 6.7
  Top Layer w0.75: VD5.1@73.52,9.41 73.58,9.35 76.075,9.35 ; VT6.1 76.075,9.35 ; R17.1@77.575,9.35 76.075,9.35
  other v1: 73.595,9.285
VCC: C5.1 C6.2 D1.7 L1.2 R14.1 SW1.1 VT1.2 X2.1 | length 174.1
  Top Layer w0.8: D1.7 C6.2@31.41,16.735 ; C6.2 31.75,20.2 36.325,20.2 36.55,20.425
  Top Layer w2: 36.55,20.425 36.55,29.625 ; 55.7,29.225 55.7,13.675 L1.2 62.025,12.975 C5.1 ; 64.275,29.625 36.55,29.625 ; 81.975,75.525 80.675,76.825 37.722,76.825 36.55,75.653 36.55,29.625 ; VT1.2 89.25,36.075 SW1.1
  Top Layer w2.7: VT1.2@87.375,37.85 87.35,37.825 89.125,36.05 VT1.2
  other v1: 87.375,46.05
  other v4: 87.3,69.9
pads on no net: D1.28 D2. SW1.3 VD1.3 VD1.4 VD5.3 VD5.4 VT1. VT2. VT4. VT5. VT6. X1. X2. X3. X4.
copper on no net: | length 30.1
  Top Layer w3: v2@69.8,1.69 74.79,1.69 94.92,1.69 v2@99.94,1.69
  other v2: 69.785,1.665 74.865,1.665 94.795,1.85 99.875,1.85
  other v3: 102.4,24.125 3.775,24.3 3.825,75.6 102.375,75.65

## Polygon pours and split planes (outlines as drawn)
GND on Top Layer "GND_L01_P009" (solid, pour order 9): 17.65,6.45 17.65,12.3 17.625,12.325 20.7,12.325 21.825,11.2 23.725,11.2 23.725,6.45
VCC on Top Layer "VCC_L01_P010" (solid, pour order 10): 88.425,68.675 77.875,68.675 77.875,77.825 77.9,77.8 88.425,77.8
GND on Top Layer "GND_L01_P012" (solid, pour order 12): 79.4,7.1 79.425,7.125 86.225,7.125 86.225,13.275 84.25,15.25 84.25,32.025 79.75,32.025 79.35,31.625
GND on Top Layer "GND_L01_P004" (solid, pour order 4): 79,54.875 79,34 72.475,34 72.475,30.8 84.25,30.8 84.25,54.875
NetC1_1 on Top Layer "NETC1_1_L01_P000" (solid, pour order 0): 2,45 25,45 25,71.825 2,71.825
NetR7_1 on Top Layer "NETR7_1_L01_P013" (solid, pour order 13): 86,38.65 86,47.375 92.525,47.375 92.475,47.325 92.475,38.65
no net on Top Layer "NONET_L01_P011" (solid, pour order 11): 79.4,7.1
GND on Top Layer "GND_L01_P003" (solid, pour order 3): 79,48.4 95.025,48.4 95.025,66.95 95.025,77.8 89.7,77.8 89.7,67.5 76,67.5 76,73 62.5,73 62.5,53.75 79,53.75
GND on Top Layer "GND_L01_P008" (solid, pour order 8): 80.25,38.526 78.962,32.538 72.727,33.847
NetC1_2 on Top Layer "NETC1_2_L01_P007" (solid, pour order 7): 74.85,51.525 67.537,44.212 60.95,44.575
no net on Top Layer "NONET_L01_P006" (solid, pour order 6): 71.875,48
NetC1_2 on Top Layer "NETC1_2_L01_P005" (solid, pour order 5): 59,72.9 42.5,72.9 42.5,36.225 68,36.225 68,47.775 75.65,47.775 75.65,51.65 59,51.65
no net on Top Layer "NONET_L01_P001" (solid, pour order 1): 78.6,63.55

## Silkscreen, mask and mechanical layers (free items; w line width, h text height)
Border:
  the board outline again, w0.2

## Dimensions
-1.9,-0.025 to -1.9,81.75 on Size
-1.9,81.75 to 108,81.75 on Size